# Altium PCB stm32.PcbDoc
Units mm, origin at the board's own origin, x right, y up, seen from the top; angles counter-clockwise.
Board outline 35.2 x 35.2 mm, 4 copper layers (L1(Signal), L2(GND), L3(GND), L4(Signal)), stack 1.57 mm thick; 35 components, 27 nets, 172 pads, 66 vias.
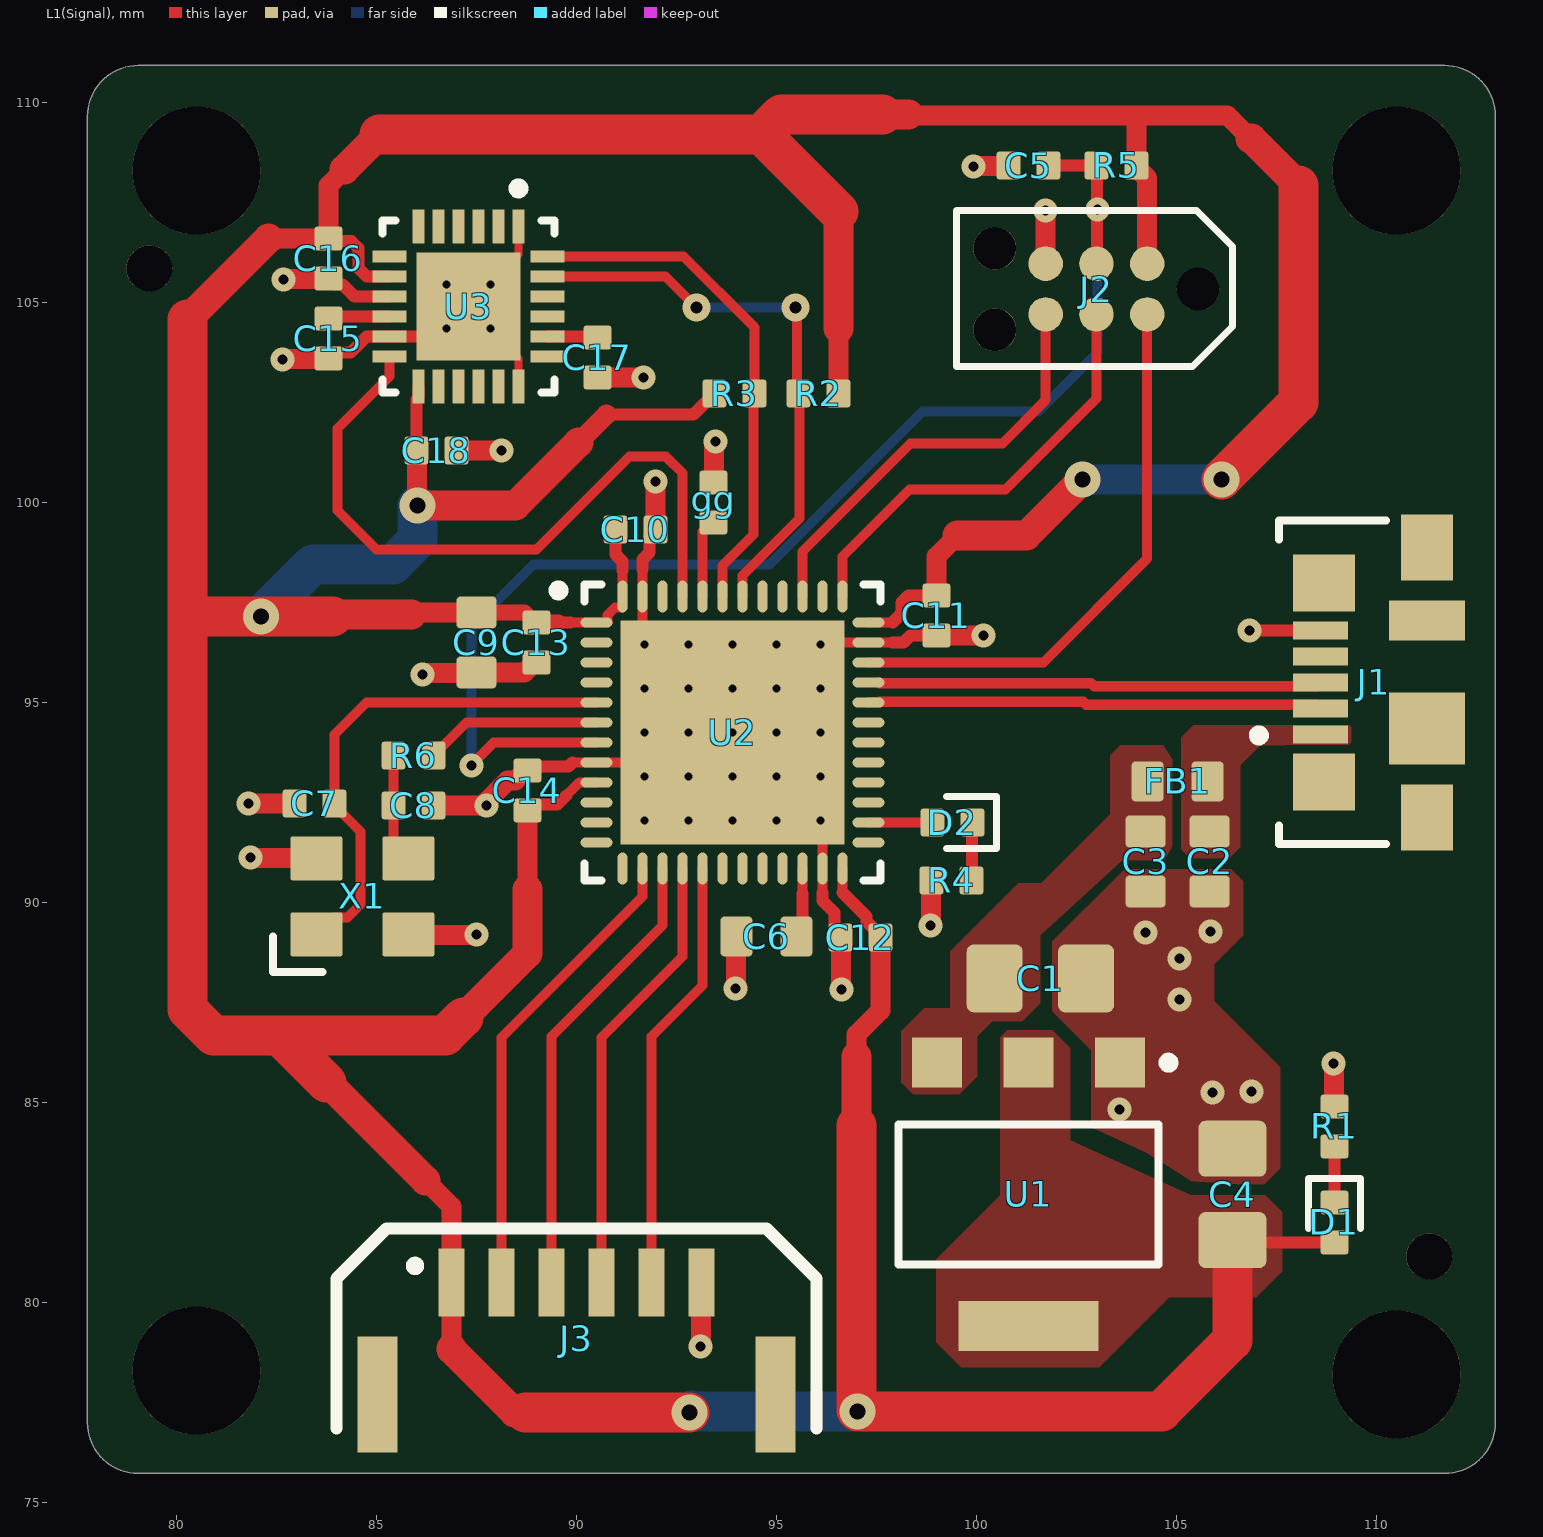
[diagram p0: L1(Signal) view]
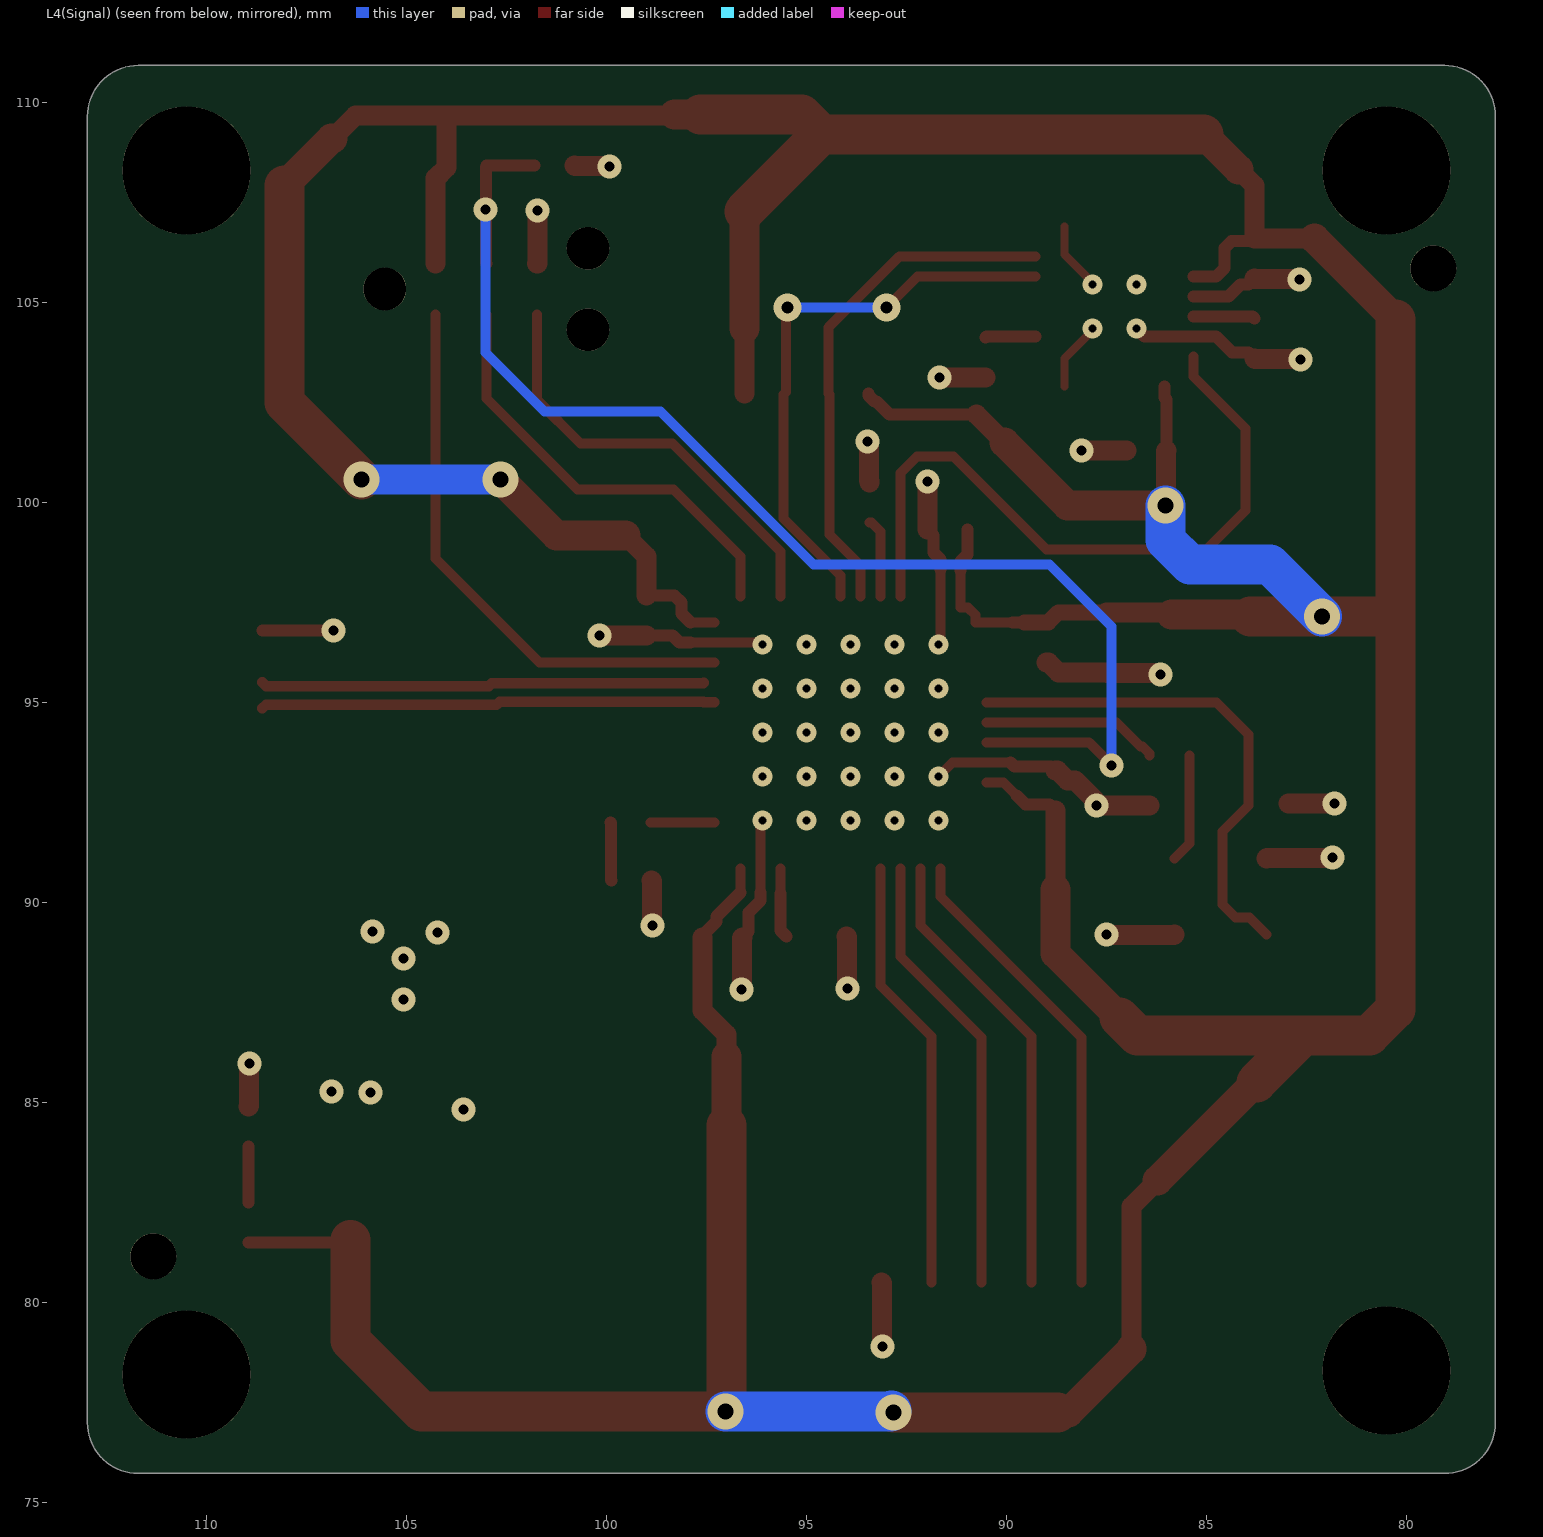
[diagram p1: L4(Signal) view, seen from below]
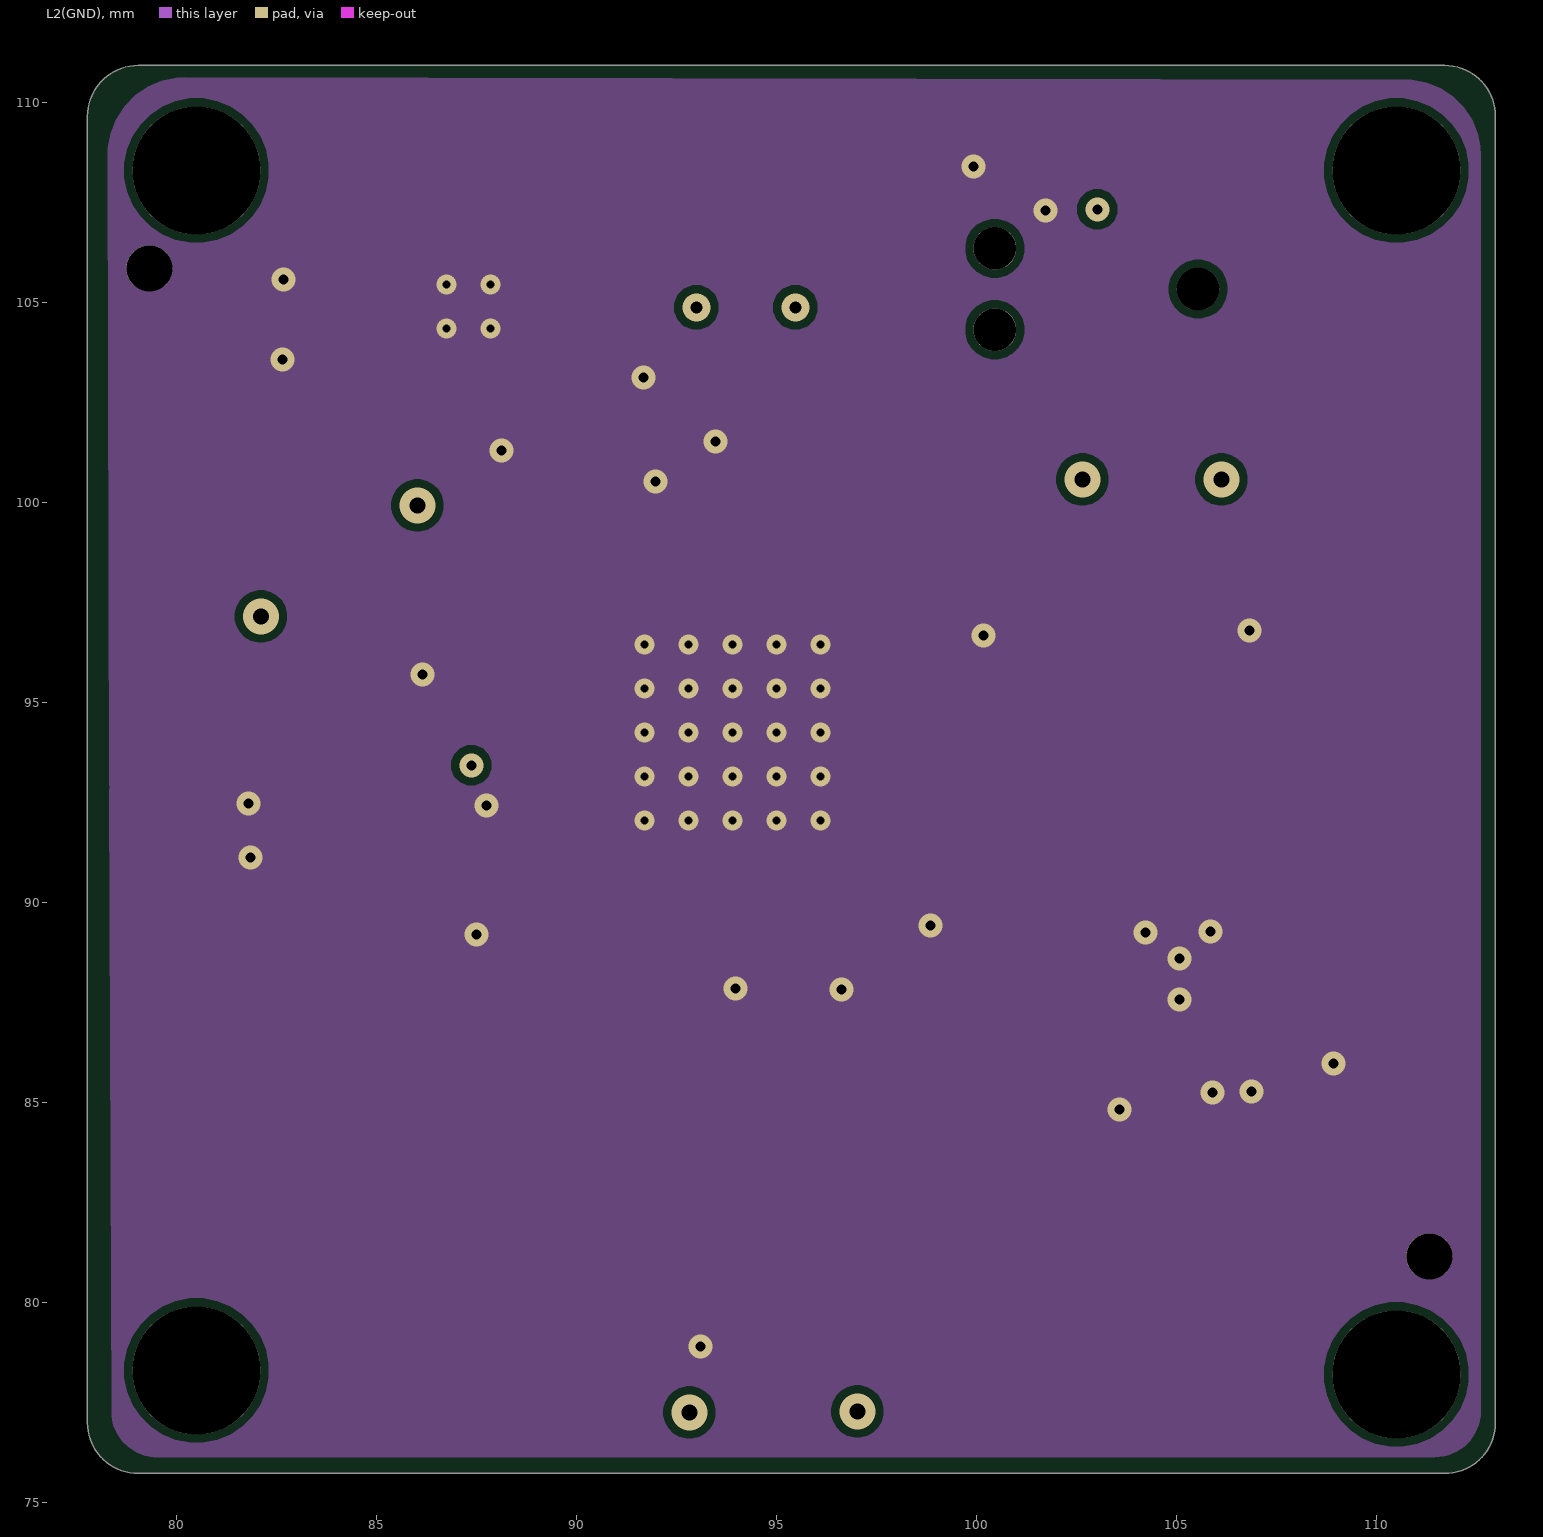
[diagram p2: L2(GND)]
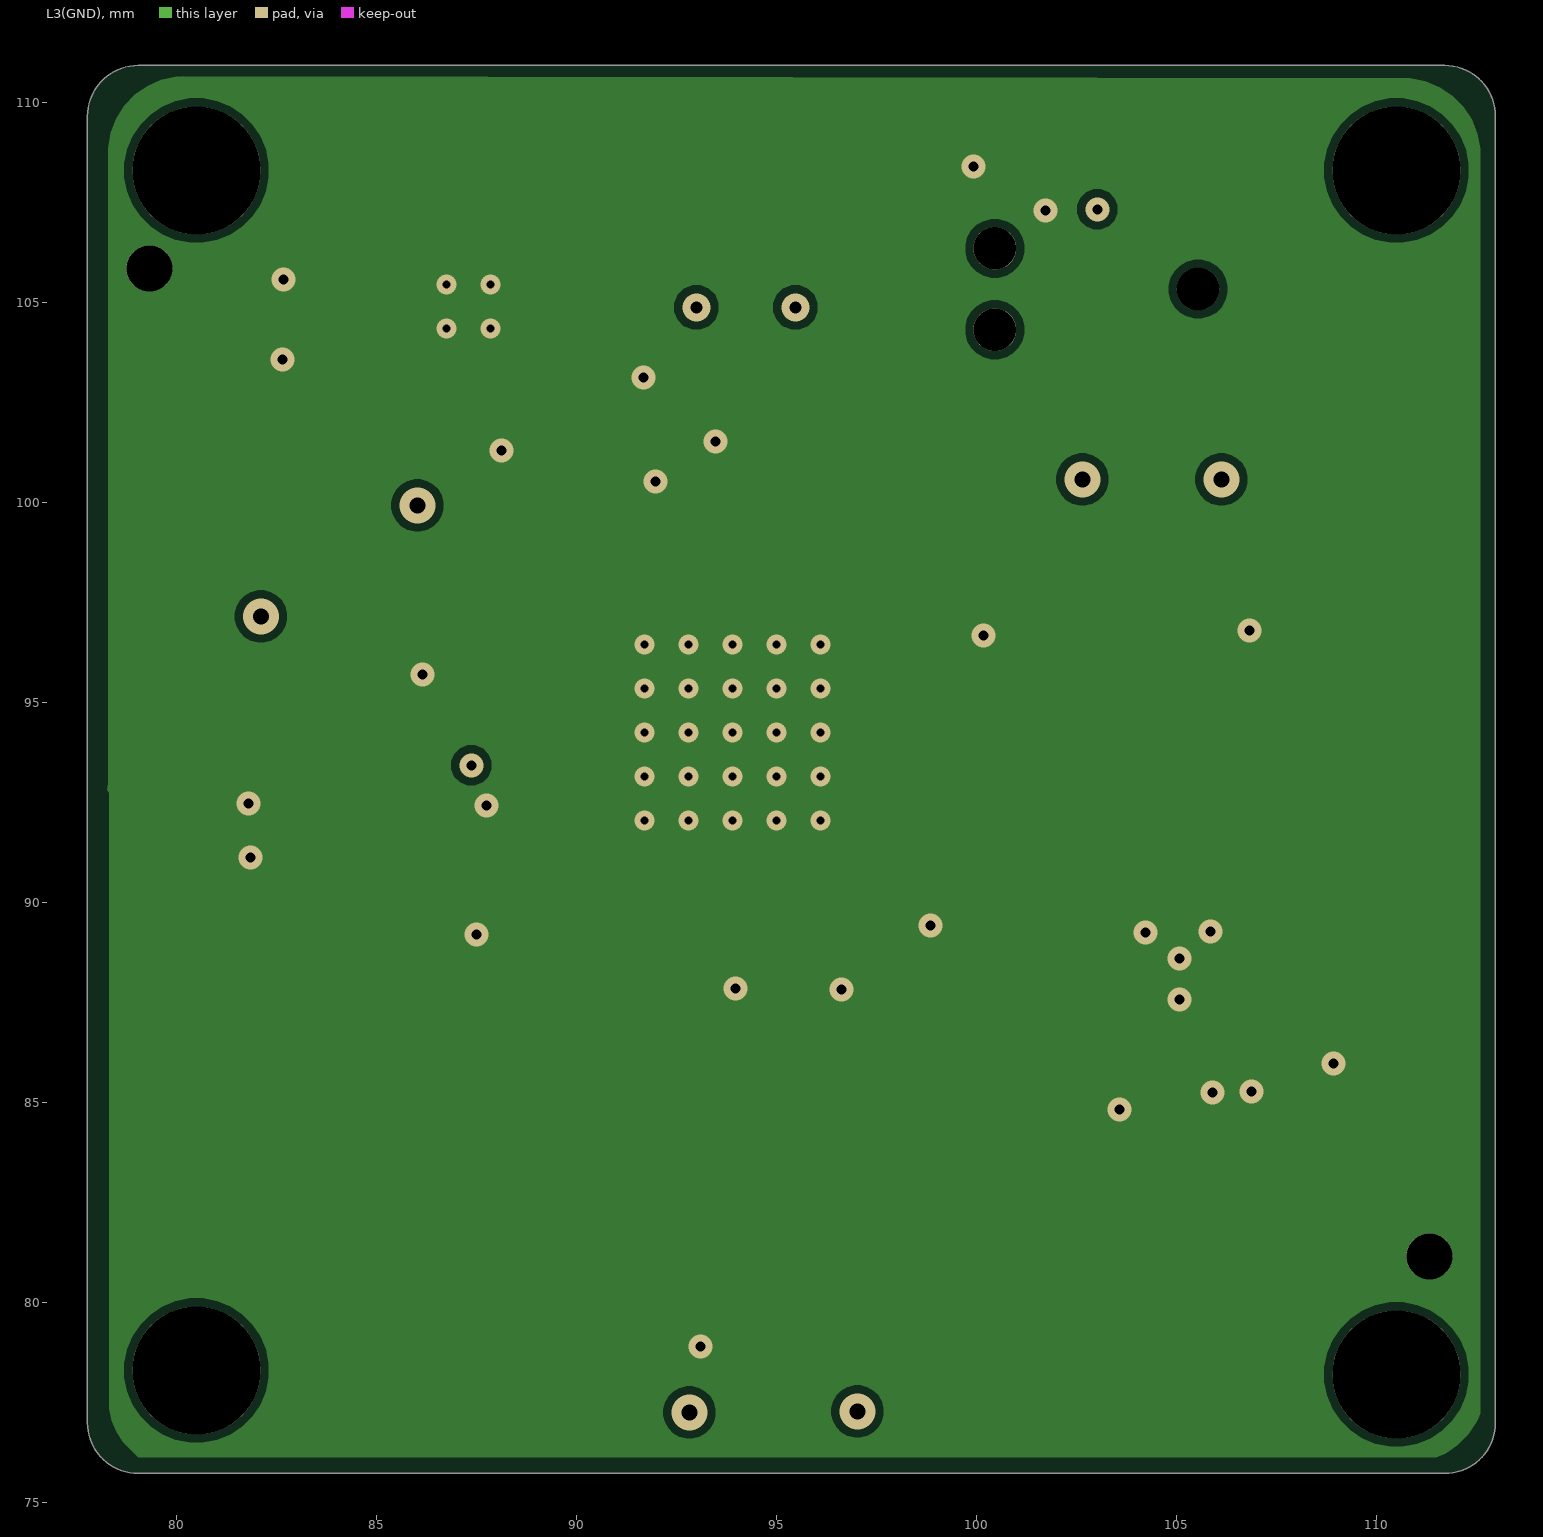
[diagram p3: L3(GND)]
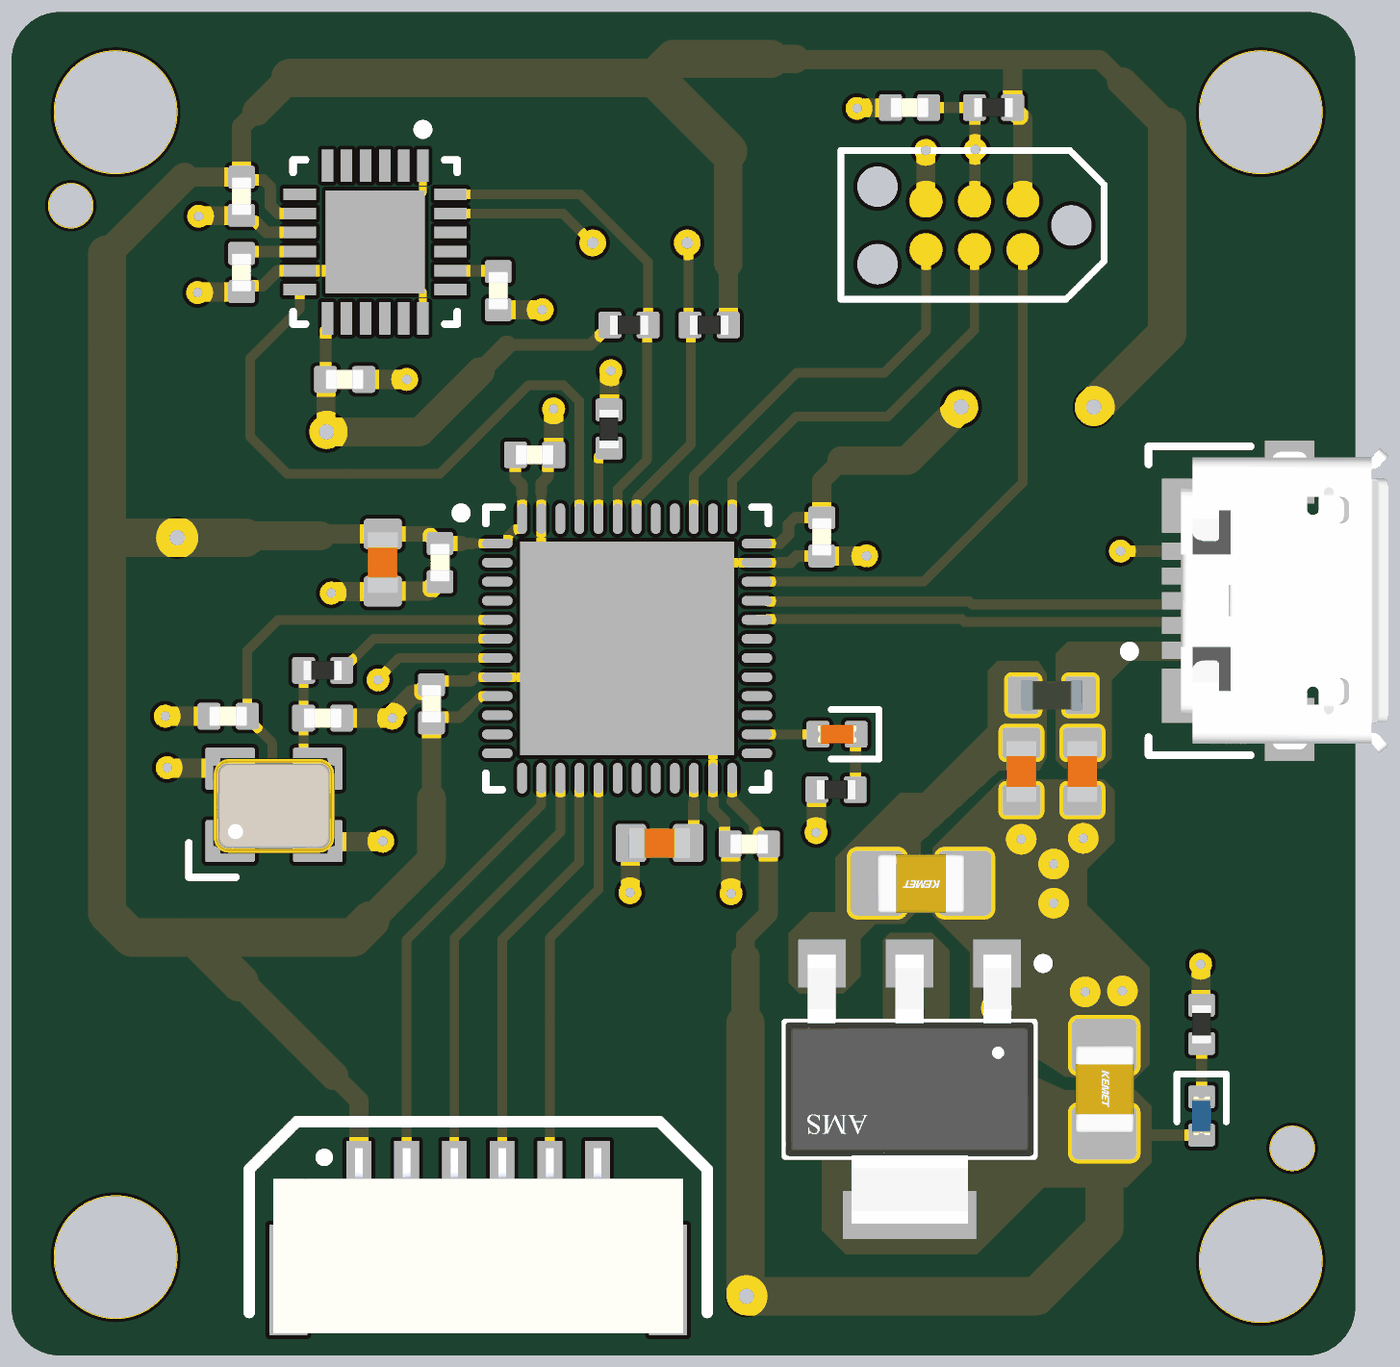
[diagram p4: 3D render of the assembled board from above, using the file's embedded part models]

## Layer stack, top to bottom
Top Solder: solder mask 0.0254, SM-001, Dk 4
L1(Signal): signal copper 0.035
Dielectric 1: prepreg 0.2, PP-017, Dk 4.6
L2(GND): signal copper 0.0175
Dielectric 3: core 1.065, Core-039, Dk 4.6
L3(GND): signal copper 0.0175
Dielectric 5: prepreg 0.2, PP-017, Dk 4.6
L4(Signal): signal copper 0.035
Bottom Solder: solder mask 0.0254, SM-001, Dk 4

## Board outline
77.775,76.995 77.775,109.655 cw(c79.045,109.655) 79.045,110.925 111.705,110.925 cw(c111.705,109.655) 112.975,109.655 112.975,76.995 cw(c111.705,76.995) 111.705,75.725 79.045,75.725 cw(c79.045,76.995)

## Design rules (kind name [scope] priority, off if disabled: settings)
Clearance [All] p1: gap=0.2 ignorepadtopadclearanceinfootprint=FALSE
DiffPairsRouting [All] p1: maxlimit=0.254 minlimit=0.203 mostfreqgap=0.254 toplayer_maxgap=0.203 toplayer_prefgap=0.203 toplayer_minwidth=0.26 toplayer_maxwidth=0.26 toplayer_prefwidth=0.26 bottomlayer_maxgap=0.203 bottomlayer_prefgap=0.203 bottomlayer_minwidth=0.26 bottomlayer_maxwidth=0.26 bottomlayer_prefwidth=0.26 impedanceprofiledriven=TRUE impedanceprofileid={C6D69986-1E30-4C43-89C5-38779B0FD605} impedanceprofilevalue=90.000000 maxuncoupledlength=12.7
HoleSize [All] p1: absolutevalues=TRUE maxlimit=3.5 minlimit=0.025 maxpercent=80.000 minpercent=20.000
MinimumSolderMaskSliver [All] p1: minsoldermaskwidth=0.05
PolygonConnect [All] p1: connectstyle=Direct reliefconductorwidth=0.254 reliefentries=4 polygonreliefangle="90 Angle" airgapwidth=0.254
RoutingVias [All] p1: holewidth=0.3 width=0.7 viastyle="Through Hole" minholewidth=0.2 minwidth=0.5 maxholewidth=0.4 maxwidth=0.9
SilkToSolderMaskClearance [IsPad] p1: minsilkscreentomaskgap=0.2 clearancetoexposedcopper=TRUE
SolderMaskExpansion [All] p1: expansion=0.102 istentingtop=FALSE
SupplyNets "Schematic Supply Nets_3" [InNet('VBUS')] p1: voltage=0.000
SupplyNets "Schematic Supply Nets_2" [InNet('+3V3')] p2: voltage=0.000
SupplyNets "Schematic Supply Nets_1" [InNet('GND')] p3: voltage=0.000
SupplyNets "Schematic Supply Nets" [InNet('+5V')] p4: voltage=0.000
UnRoutedNet [All] p1: checkbadconnections=TRUE
Width [All] p1: maxlimit=1 minlimit=0.2 preferedwidth=0.3 midlayer1_minwidth=0.254 midlayer1_maxwidth=0.254 midlayer1_prefwidth=0.254 midlayer2_minwidth=0.254 midlayer2_maxwidth=0.254 midlayer2_prefwidth=0.254 minimp=50.000000 maximp=50.000000 favimp=50.000000
25 further rules are at their usual default settings.

## Classes and differential pairs
differential pair class DIFF_USB: USB_D
differential pair USB_D: +USB_D_P -USB_D_N

## Components (designator, comment, footprint, x,y, rotation, side; value= is the part's Value field where it differs from the comment)
C1 "22u" CAP_0805 101.6,88.1 r180 top
C2 "2u2" CAP_0603 105.829,91.025 r90 top
C3 "2u2" CAP_0603 104.229,91.025 r90 top
C4 "22u" CAP_0805 106.4,82.7 r270 top
C5 "100n" CAP_0402 101.3,108.425 r0 top
C6 "2u2" CAP_0603 94.75,89.15 r0 top
C7 "10p" CAP_0402 83.45,92.475 r0 top
C8 "10p" CAP_0402 85.925,92.425 r180 top
C9 "2u2" CAP_0603 87.5,96.5 r90 top
C10 "100n" CAP_0402 91.475,99.325 r180 top
C11 "100n" CAP_0402 99,97.175 r90 top
C12 "100n" CAP_0402 97.1,89.125 r0 top
C13 "100n" CAP_0402 89,96.5 r90 top
C14 "100n" CAP_0402 88.775,92.8 r270 top
C15 "100n" CAP_0402 83.8,104.1 r90 top
C16 "10n" CAP_0402 83.8,106.1 r90 top
C17 "2n2" CAP_0402 90.525,103.625 r90 top
C18 "100n" CAP_0402 86.5,101.3 r180 top
D1 "BLUE" LED_0402_BLUE 108.95,82 r90 top
D2 "RED" LED_0402_RED 99.4,92 r0 top
FB1 "120R" FB_0603 105.029,93.025 r180 top
gg "10k" RES_0402 93.425,100 r270 top (schematic designator R7)
J1 "473460001" FP-473460001-MFG 110.91,95.5 r90 top
J2 "TC2030" TC2030-FP 103,105.335 r180 top
J3 "SM06B-GHS-TB" SM06B-GHS-TB 90,79.1 r0 top
R1 "1k" RES_0402 108.95,84.4 r270 top
R2 "2k2" RES_0402 96.05,102.725 r0 top
R3 "2k2" RES_0402 93.95,102.725 r180 top
R4 "1k" RES_0402 99.375,90.55 r0 top
R5 "10k" RES_0402 103.5,108.425 r0 top
R6 "0R" RES_0402 85.925,93.675 r180 top
U1 "AMS1117-3.3" FP-AMS1117-IPC_C 101.3,82.7 r270 top
U2 "STM32F411CEU6" STM-UFQFPN48_L 93.9,94.25 r0 top
U3 "MPU-6050" IS-QFN-24_V 87.3,104.9 r270 top
X1 "24MHz" XTAL_3225 84.65,90.15 r0 top

## Footprints (in the part's own frame and the unit in brackets; to place one, negate y for a bottom-side part, rotate by r counter-clockwise, add the part's x,y. Pads: shape width x height; smd on the part's side, far side on the other; paste and mask are expansions set on the pad)
CAP_0402 [mm]
  rrect25% 0.6x0.7 smd: 1(-0.5,0) 2(0.5,0)
  body extent -0.5,-0.26 0.5,0.26, height 0.37
CAP_0603 [mm]
  rrect25% 0.8x1 smd: 1(-0.75,0) 2(0.75,0)
  body extent -0.8,-0.4 0.8,0.4, height 0.51
CAP_0805 [mm]
  rrect25% 1.4x1.7 smd: 1(-1.143,0) 2(1.143,0)
  body extent -1.15,-0.76 1.15,0.79, height 1.01
FB_0603 [mm]
  rrect25% 0.8x1 smd: 1(-0.75,0) 2(0.75,0)
  body extent -0.8,-0.4 0.8,0.4, height 0.81
FP-473460001-MFG [mm]
  rect 0.45x1.38 smd paste+0 mask+0: 1(-1.3,2.31) 2(-0.65,2.31) 3(0,2.31) 4(0.65,2.31) 5(1.3,2.31)
  rect 1.425x1.55 smd paste+0 mask+0: 6(-2.488,2.225) 7(2.488,2.225)
  rect 1.65x1.3 smd paste+0 mask+0: 8(-3.375,-0.35) 11(3.375,-0.35)
  rect 1.8x1.9 smd paste+0 mask+0: 9(-1.15,-0.35)
  rect 1x1.9 smd paste+0 mask+0: 10(1.55,-0.35)
  silkscreen extent -4.05,0.67 4.05,3.97, body extent -4.3,-2.48 4.3,3.45, height 0.25
FP-AMS1117-IPC_C [mm]
  rect 1.25x1.25 smd paste+0 mask+0: 1(-3.295,2.29) 2(-3.295,0) 3(-3.295,-2.29)
  rect 1.25x3.5 smd paste+0 mask+0: 4(3.295,0)
  silkscreen extent -3.42,-3.25 1.75,3.63, body extent -3.9,-3.35 3.9,3.35, height 0.25
IS-QFN-24_V [mm] "QFN, 24-Leads, Body 4x4mm, Pitch 0.5mm, Thermal Pad 2.7x2.6mm"
  rect 0.85x0.3 smd: 1(-2,1.25) 2(-2,0.75) 3(-2,0.25) 4(-2,-0.25) 5(-2,-0.75) 6(-2,-1.25) 13(2,-1.25) 14(2,-0.75) 15(2,-0.25) 16(2,0.25) 17(2,0.75) 18(2,1.25)
  rect 0.3x0.85 smd mask+0.102: 7(-1.25,-1.975) 8(-0.75,-1.975) 9(-0.25,-1.975) 10(0.25,-1.975) 11(0.75,-1.975) 12(1.25,-1.975) 19(1.25,1.975) 20(0.75,1.975) 21(0.25,1.975) 22(-0.25,1.975) 23(-0.75,1.975) 24(-1.25,1.975)
  rect 2.7x2.6 smd: 25(0,0)
  silkscreen extent -3.07,-2.15 2.15,2.15, body extent -2,-2 2,2, height 0.95
LED_0402_BLUE [mm]
  rrect25% 0.6x0.7 smd: A(-0.5,0) K(0.5,0)
  silkscreen extent -0.15,-0.65 1.1,0.65, body extent -0.51,-0.25 0.51,0.25, height 0.45
LED_0402_RED [mm]
  rrect25% 0.6x0.7 smd: A(-0.5,0) K(0.5,0)
  silkscreen extent -0.15,-0.65 1.1,0.65, body extent -0.51,-0.25 0.51,0.25, height 0.45
RES_0402 [mm]
  rrect25% 0.6x0.7 smd: 1(-0.5,0) 2(0.5,0)
  body extent -0.5,-0.25 0.5,0.25, height 0.3
SM06B-GHS-TB [mm]
  rect 0.65x1.7 smd: 1(-3.125,1.4) 2(-1.875,1.4) 3(-0.625,1.4) 4(0.625,1.4) 5(1.875,1.4) 6(3.125,1.4)
  rect 1x2.9 smd: ""(-4.975,-1.4) ""(4.975,-1.4)
  silkscreen extent -6,-2.25 6,2.75, body extent -5.38,-2.8 5.38,2.05, height 4.26
STM-UFQFPN48_L [mm] "QFN, 48-Leads, Body 7.1x7.1mm, Pitch 0.5mm, Thermal Pad 5.6x5.6mm, IPC High Density"
  oval 0.8x0.25 smd: 1(-3.4,2.75) 2(-3.4,2.25) 3(-3.4,1.75) 4(-3.4,1.25) 5(-3.4,0.75) 6(-3.4,0.25) 7(-3.4,-0.25) 8(-3.4,-0.75) 9(-3.4,-1.25) 10(-3.4,-1.75) 11(-3.4,-2.25) 12(-3.4,-2.75) 25(3.4,-2.75) 26(3.4,-2.25) 27(3.4,-1.75) 28(3.4,-1.25) 29(3.4,-0.75) 30(3.4,-0.25) 31(3.4,0.25) 32(3.4,0.75) 33(3.4,1.25) 34(3.4,1.75) 35(3.4,2.25) 36(3.4,2.75)
  oval 0.25x0.8 smd: 13(-2.75,-3.4) 14(-2.25,-3.4) 15(-1.75,-3.4) 16(-1.25,-3.4) 17(-0.75,-3.4) 18(-0.25,-3.4) 19(0.25,-3.4) 20(0.75,-3.4) 21(1.25,-3.4) 22(1.75,-3.4) 23(2.25,-3.4) 24(2.75,-3.4) 37(2.75,3.4) 38(2.25,3.4) 39(1.75,3.4) 40(1.25,3.4) 41(0.75,3.4) 42(0.25,3.4) 43(-0.25,3.4) 44(-0.75,3.4) 45(-1.25,3.4) 46(-1.75,3.4) 47(-2.25,3.4) 48(-2.75,3.4)
  rect 5.6x5.6 smd: 49(0,0)
  silkscreen extent -4.47,-3.7 3.7,3.7, body extent -3.55,-3.55 3.55,3.55, height 0.6
TC2030-FP [mil]
  round 33.98 smd paste-17.01: 1(-50,-25) 2(-50,25) 3(0,-25) 4(0,25) 5(50,-25) 6(50,25)
  round 42.01 hole 42.01 unplated: MH(-100,0) MH(100,-40) MH(100,40)
  silkscreen extent -75,-77 138,76
XTAL_3225 [mm]
  rrect10% 1.3x1.1 smd: 1(-1.15,-0.95) 2(1.15,-0.95) 3(1.15,0.95) 4(-1.15,0.95)
  silkscreen extent -2.23,-1.89 -1,-1, body extent -1.6,-1.28 1.6,1.22, height 0.61

## Part data
C1 C4: library part CAP_0805, "Capacitor SMD 0805"
C2 C3 C6 C9: library part CAP_0603, "Capacitor SMD 0603"
C5 C7 C8 C10 C11 C12 C13 C14 C15 C16 C17 C18: library part CAP_0402, "Capacitor SMD 0402"
D1: library part LED_0402_BLUE, "LED 0402 BLUE SMD"
D2: library part LED_0402_RED, "LED 0402 RED SMD"
FB1: library part FB_0603, "Ferrite Bead SMD 0603"
gg R1 R2 R3 R4 R5 R6: library part RES_0402, "Resistor SMD 0402"
J1: library part CMP-2000-05246-2, "CONN RCPT USB2.0 MICRO B SMD R/A", Current Rating=1.8A, Manufacturer=Molex, Package=0, Temperature="-30°C to +85°C", Temperature Range High=+85°C, Temperature Range Low=-30°C, Voltage Rating=30V, Automotive=No, Category=Conn, ComponentLink2Description=Datasheet, ComponentLink2URL=https://www.molex.com/webdocs/datasheets/pdf/en-us/0473460001_IO_CONNECTORS.pdf, Conn Orientation="Right Angle", Contact Material=Gold,Nickel, Device Class L1=Connectors, Device Class L2="USB Connectors", Device Class L3=unset, Digikey Description="CONN RCPT USB2.0 MICRO B SMD R/A", Footprint Url=https://www.molex.com/pdm_docs/sd/473460001_sd.pdf, Height=2.945mm, Is Female=yes, Lead Free=Yes, Manufacturer Part Number=473460001, Number Of Contacts=5, Octopart=https://octopart.com/47346-0001-molex-7164928, Pitch=0.65mm, RoHS=TRUE, Shielding=true, Usb Standard="USB 2.0"
J2: "Tag-Connect No-Solder SWD Debug Connector DO NOT PLACE", Manufacturer=Tag-Connect, Manufacturer Part Number=TC2030
J3: "Header Connector 6 Position 1.25MM Pitch SMD Horizontal JST GH", Manufacturer=JST, Manufacturer Part Number=SM06B-GHS-TB
U1: library part CMP-209535-000001-1, "LDO Voltage Regulators 1A, 3.3V", Dropout Voltage=1.1V, Manufacturer="Advanced Monolithic Systems", Max Junction Temp=+125°C, Max Power Dissipation=1.2W, Max Supply Voltage=15V, Nominal Supply Current=5mA, Output Current=1A, Output Voltage=3.3V, Package=AMS1117, Temperature="-40°C to +125°C", Temperature Range Low=-40°C, Automotive=No, Category=IC, ComponentLink2Description=Datasheet, ComponentLink2URL=http://www.advanced-monolithic.com/pdf/ds1117.pdf, Device Class L1="Integrated Circuits (ICs)", Device Class L2="Power Management ICs", Device Class L3="Voltage Regulators - Linear", Height=1.8mm, Ipc Land Pattern Name=SOT229P700X180-4, Lead Free=Yes, Manufacturer Part Number=AMS1117-3.3, Number Of Outputs=1, Octopart=https://octopart.com/ams1117-3.3-advanced+monolithic+systems-25899300, Output Type=Fixed, RoHS=TRUE, Standoff Height=0.64mm, Temperature Range High=+125°C
U2: library part CMP-0243-00165-1, "ARM Cortex-M4 32-bit MCU+FPU, 512 KB Flash, 128 KB RAM, 36 I/Os, 48-Pin UFQFPN, -40 to 85 degC, Tray", I/Os (High Current)=36, Operating Frequency(F) (Processor speed) (MHz)=100, Package Description=UFQFPN48, Package Reference="48-Pin Ultra Thin Fine Pitch Quad Flat No-Lead, 7 x 7 x 0.6 mm Body, 0.5 mm Pitch, Exposed Pad", Supply Voltage(Vcc) min (V)=1.7, ComponentLink1Description="Manufacturer URL", ComponentLink1URL=http://www.st.com/, ComponentLink2Description=Datasheet, ComponentLink2URL=http://www.st.com/st-web-ui/static/active/en/resource/technical/document/datasheet/DM00115249.pdf, Core="ARM Cortex-M4", DatasheetVersion="Rev. 6", FLASH Size (Prog) (kB)=512, Internal RAM Size (kB)=128, Mounting Technology="Surface Mount", Packing=Tray
U3: library part CMP-1753-00002-2, "3-Axis Gyroscope, Accelerometer and a Digital Motion Processor(TM) (DMP), 2.375 to 3.46 V, -40 to 85 degC, 24-Pin QFN, RoHS, Tape and Reel", Manufacturer=InvenSense, Standard Package=5,000, Category=Sensors,Transducers, Datasheet URL=http://datasheet.octopart.com/MPU-6050-InvenSense-datasheet-14421344.pdf, Datasheet Version="Rev. 3.3, 05/2012", Dynamic Catalog=MPU-6000™Series, Family=Multifunction, Featured Product=MPU-60506-Axis,IntegratedI²CSolution, Manufacturer URL=http://www.invensense.com/, Online Catalog=MPU-6000™Series, Other Names="1428-1007-2 / MPU6050", Output Type=Digital, Sensor Type=MotionTracking, Unit PriceUSD=Digital
X1: library part TSX-3225_24.0000MF15X-AC, "Crystal SMD 24MHz 10PPM 7pF 3225", Manufacturer=Epson, Manufacturer Part Number="TSX-3225 24.0000MF15X-AC"

## Free pads (board coordinates)
  round 3.2 hole 3.2: MH(80.5,78.3) MH(80.5,108.3) MH(110.5,78.2) MH(110.5,108.3)
  round 1.15 hole 1.15: TH(79.325,105.85) TH(111.325,81.15)

## Via types
v1: diameter 0.6, hole 0.25, L1(Signal) to L4(Signal), 29 vias
v2: diameter 0.5, hole 0.2, L1(Signal) to L4(Signal), 29 vias
v3: diameter 0.9, hole 0.4, L1(Signal) to L4(Signal), 6 vias
v4: diameter 0.7, hole 0.3, L1(Signal) to L4(Signal), 2 vias

## Nets (pads, with @x,y where several pads share a name; then routed paths per layer and width w, separated by ;. In a path a pad name is that pad's centre, name@x,y a point inside that pad or via, vN(x,y) a via of type N, cw(c..) or ccw(c..) an arc to the next point about the centre after c; other vN are vias at no path point)
+3V3: C4.2 C9.2 C10.2 C11.2 C12.2 C13.2 C14.2 C16.2 C18.2 D1.A J2.1 J3.1 R2.2 R3.2 R5.2 U1.2 U1.4 U2.1 U2.9 U2.24 U2.36 U2.48 U3.8 U3.13 | length 176.5
  L1(Signal) w0.25: 89.747,92.675 90.072,93 U2.9 ; 89.85,97 U2.1 90.775,97 90.775,97.185 90.965,97.375 91.15,97.375 U2.48 91.15,98.3 ; 96.65,90.25 U2.24 ; U2.36 97.9,97
  L1(Signal) w0.3: C16.2@83.868,106.532 84.374,106.532 84.55,106.356 84.55,105.855 84.755,105.65 U3.8 ; C18.2 86,102.575 86.05,102.625 U3.13 ; C14.2 88.925,92.45 89.522,92.45 89.747,92.675 ; 89.55,97 89.85,97 ; 90.75,102.2 92.925,102.2 93.25,102.525 93.3,102.525 93.45,102.675 R3.2 ; C10.2 90.975,98.7 91.15,98.525 91.15,98.3 ; 96.65,90.25 97.25,89.65 97.25,89.525 97.6,89.175 C12.2 ; 97.9,97 98.125,97.225 98.125,97.499 98.301,97.675 C11.2 ; C4.2 106.457,81.5 D1.A
  L1(Signal) w0.4: C9.2 88.7,97.25 88.95,97 C13.2 89.55,97
  L1(Signal) w0.5: 82.3,106.6 C16.2 83.8,107.925 84.2,108.325 ; 85.875,97.2 85.925,97.25 C9.2 ; C18.2 86.013,101.287 86.013,99.937 v3(86.025,99.925) ; 86.225,83.05 86.875,82.4 J3.1 86.875,78.85 ; 88.775,90.325 C14.2 ; 90.05,101.5 90.75,102.2 ; R2.2 96.55,104.35 ; 97,86.15 97,86.7 97.6,87.3 C12.2 ; 98.3,109.7 98.325,109.675 104,109.675 ; C11.2 99,98.65 99.525,99.175 ; R5.2@104,108.375 104.27,108.105 J2.1 ; R5.2 104,109.675 ; 106.85,109.1 106.275,109.675 104,109.675
  L1(Signal) w0.75: 80.275,104.575 82.3,106.6 ; 83.75,85.5 83.775,85.5 86.225,83.05 ; 83.9,97.15 83.95,97.2 85.875,97.2 ; 84.2,108.325 85.075,109.2 ; v3(86.025,99.925) 88.475,99.925 90.05,101.5 ; 86.875,78.85 86.875,78.825 88.45,77.25 88.725,77.25 ; 87.175,87.125 88.775,88.725 88.775,90.325 ; 96.55,104.35 96.55,107.275 ; 97,84.425 97,86.15 ; 97.65,109.7 98.3,109.7 ; 99.525,99.175 101.25,99.175 v3(102.65,100.575) ; 106.85,109.1 106.875,109.1 108.05,107.925
  L1(Signal) w1: 80.275,104.575 80.275,97.2 ; 83.75,85.5 82.575,86.675 ; 83.9,97.15 v3(82.113,97.15) 80.325,97.15 80.275,97.2 ; 85.075,109.2 94.625,109.2 ; 87.175,87.125 86.725,86.675 82.575,86.675 ; 88.725,77.25 v3(92.825,77.25) ; 96.55,107.275 94.625,109.2 ; 97,84.425 97,77.3 v3(97.025,77.275) 104.625,77.275 106.4,79.05 C4.2 ; 97.65,109.7 95.125,109.7 94.625,109.2 ; v3(106.125,100.575) 108.05,102.5 108.05,107.925 ; 80.275,97.2 80.275,87.325 80.925,86.675 82.575,86.675
  L4(Signal) w0.75: v3(102.65,100.575) v3(106.125,100.575)
  L4(Signal) w1: v3(82.113,97.15) 83.413,98.45 85.414,98.45 86.025,99.061 v3(86.025,99.925) ; v3@92.875,77.3 92.9,77.275 v3(97.025,77.275)
+5V: C1.2 C3.2 FB1.2 U1.3
GND: C1.1 C2.1 C3.1 C4.1 C5.1 C6.1 C7.1 C8.1 C9.1 C10.1 C11.1 C12.1 C13.1 C14.1 C15.1 C16.1 C17.1 C18.1 gg.1 J1.5 J2.5 J3.6 pad.TH R1.1 R4.1 U1.1 U2.8 U2.23 U2.35 U2.47 U2.49 U3.1 U3.9 U3.11 U3.18 U3.25 X1.2 X1.4 | length 49.4
  L1(Signal) w0.2: v2(87.85,104.35) 87.85,104.3 88.55,103.6 U3.18 ; U3.25@87.85,105.5 88.55,106.2 U3.1
  L1(Signal) w0.25: 89.9,93.5 U2.8 91.35,93.5 v2(91.7,93.15) ; 91.65,98.325 U2.47 91.65,96.5 v2(91.7,96.45) ; v2(96.1,92.05) 96.15,92 U2.23 96.15,90.25 ; v2(96.1,96.45) 96.15,96.5 U2.35 97.9,96.5
  L1(Signal) w0.3: C15.1 83.95,103.75 84.355,103.75 84.755,104.15 U3.11 86.55,104.15 v2(86.75,104.35) ; C16.1 83.95,105.45 84.15,105.45 84.45,105.15 U3.9 ; C14.1@88.786,93.3 88.886,93.4 89.8,93.4 89.9,93.5 ; 91.65,98.325 91.65,98.575 91.825,98.75 91.825,99.175 C10.1 ; 96.15,90.25 96.15,90.043 96.45,89.743 96.45,89.275 C12.1 ; 97.9,96.5 98.175,96.5 98.35,96.675 C11.1 ; v1(106.825,96.8) J1.5
  L1(Signal) w0.5: v1(81.8,92.475) C7.1 ; v1(81.85,91.125) 81.862,91.113 83.487,91.113 X1.4 ; v1(82.65,103.575) 82.662,103.587 83.787,103.587 C15.1 ; v1(82.675,105.575) 82.688,105.588 83.787,105.588 C16.1 ; X1.2 85.812,89.188 87.488,89.188 v1(87.5,89.2) ; v1(86.15,95.7) 86.177,95.7 86.215,95.737 87.487,95.737 C9.1 88.7,95.75 88.95,96 C13.1 ; C8.1 v1(87.75,92.425) 87.769,92.444 87.769,92.537 88.283,93.05 88.475,93.05 88.725,93.3 C14.1 ; C18.1 v1(88.125,101.3) ; C17.1 v1(91.675,103.125) ; C10.1 v1(91.975,100.525) ; v1(93.1,78.9) 93.113,78.913 93.113,80.487 J3.6 ; gg.1 93.425,100.537 93.438,100.55 93.438,101.46 93.475,101.498 v1(93.475,101.525) ; v1(93.975,87.85) 93.988,87.863 93.988,89.137 C6.1 ; C12.1 96.613,89.113 96.613,87.838 v1(96.625,87.825) ; v1(98.85,89.425) 98.862,89.438 98.862,90.537 R4.1 ; C11.1 v1(100.175,96.675) ; v1(99.925,108.4) 99.937,108.412 100.787,108.412 C5.1 ; v1(101.725,107.3) 101.728,107.297 101.728,105.972 J2.5 ; v1(108.925,85.975) 108.937,85.963 108.937,84.912 R1.1
  other v1: 103.575,84.825 105.9,85.25 106.875,85.275 105.075,87.575 105.075,88.6 104.225,89.25 105.85,89.275
  other v2: 91.7,92.05 92.8,92.05 93.9,92.05 95,92.05 92.8,93.15 93.9,93.15 95,93.15 96.1,93.15 91.7,94.25 92.8,94.25 93.9,94.25 95,94.25 96.1,94.25 91.7,95.35 92.8,95.35 93.9,95.35 95,95.35 96.1,95.35 92.8,96.45 93.9,96.45 95,96.45 86.75,105.45 87.85,105.45
IMU_CPOUT: C17.2 U3.20 | length 1.3
  L1(Signal) w0.3: U3.20 90.5,104.15 C17.2
IMU_INT: U2.45 U3.12 | length 17.6
  L1(Signal) w0.25: U3.12 85.325,103.15 84.025,101.85 84.025,99.8 85,98.825 89,98.825 91.325,101.15 92.234,101.15 92.65,100.734 U2.45
IMU_REGOUT: C15.2 U3.10 | length 1.5
  L1(Signal) w0.3: C15.2 83.85,104.65 U3.10
IMU_SCL: R2.1 U2.42 U3.23 | length 14.4
  L1(Signal) w0.25: U3.23 92.225,105.65 v4(93,104.875) ; U2.42 94.15,98.175 95.575,99.6 95.575,102.7 R2.1 95.512,102.762 95.512,104.838 v4(95.475,104.875)
  L4(Signal) w0.25: v4(93,104.875) v4(95.475,104.875)
IMU_SDA: R3.1 U2.43 U3.24 | length 13
  L1(Signal) w0.25: U3.24 92.68,106.15 94.45,104.38 R3.1 94.425,102.7 94.425,99.2 93.65,98.425 U2.43
LED_MCU_A: D2.A U2.26 | length 1.6
  L1(Signal) w0.25: U2.26 D2.A
LED_MCU_K: D2.K R4.2 | length 1.5
  L1(Signal) w0.3: R4.2 99.887,90.562 99.887,91.987 D2.K
LED_PWR_K: D1.K R1.2 | length 1.4
  L1(Signal) w0.3: D1.K R1.2
MCU_BOOT0: gg.2 U2.44 | length 2
  L1(Signal) w0.25: U2.44 93.15,99.275 93.375,99.5 gg.2
MCU_NRST: C5.2 J2.3 R5.1 U2.7 | length 32.6
  L1(Signal) w0.25: v1(87.375,93.425) 87.375,93.444 87.931,94 U2.7 ; C5.2 C5.2@101.812,108.437
  L1(Signal) w0.3: C5.2 R5.1 ; J2.3 103.012,105.982 103.012,107.312 v1(103.025,107.325) 103.012,107.338 103.012,108.387 R5.1@103,108.4
  L4(Signal) w0.25: v1(87.375,93.425) 87.375,96.9 88.925,98.45 94.825,98.45 98.65,102.275 101.55,102.275 103.025,103.75 v1(103.025,107.325)
MCU_OSC_IN: C7.2 U2.5 X1.1 | length 12.8
  L1(Signal) w0.25: X1.1 83.925,89.625 84.275,89.625 84.6,89.95 84.6,91.775 83.95,92.425 C7.2 83.95,94.2 84.75,95 U2.5
MCU_OSC_OUT: R6.1 U2.6 | length 4.4
  L1(Signal) w0.25: R6.1 86.425,93.725 86.6,93.9 86.65,93.9 87.25,94.5 U2.6
MCU_PA4: J3.2 U2.14 | length 11.8
  L1(Signal) w0.25: J3.2 88.125,86.625 91.65,90.15 U2.14
MCU_PA5: J3.3 U2.15 | length 11.5
  L1(Signal) w0.25: J3.3 89.375,86.65 92.15,89.425 U2.15
MCU_PA6: J3.4 U2.16 | length 11.2
  L1(Signal) w0.25: J3.4 90.625,86.625 92.65,88.65 U2.16
MCU_PA7: J3.5 U2.17 | length 10.9
  L1(Signal) w0.25: J3.5 91.875,86.65 93.15,87.925 U2.17
MCU_SWCLK: J2.4 U2.37 | length 11.1
  L1(Signal) w0.25: U2.37 96.65,98.65 98.325,100.325 100.725,100.325 103,102.6 J2.4
MCU_SWDIO: J2.2 U2.34 | length 14.1
  L1(Signal) w0.25: U2.34 101.675,96 104.27,98.595 J2.2
MCU_SWO: J2.6 U2.39 | length 10.9
  L1(Signal) w0.25: U2.39 95.65,98.775 98.35,101.475 100.65,101.475 101.73,102.555 J2.6
MCU_VCAP1: C6.2 U2.22 | length 1.8
  L1(Signal) w0.25: 95.65,90.225 U2.22
  L1(Signal) w0.3: C6.2 95.65,89.3 95.65,90.225
USB_D_N: J1.2 U2.32 | length 11.4
  L1(Signal) w0.26: U2.32 97.565,95 97.583,95.018 102.673,95.018 102.748,94.943 108.507,94.943 J1.2
USB_D_P: J1.3 U2.33 | length 11.1
  L1(Signal) w0.26: U2.33@97.57,95.495 97.583,95.482 102.865,95.482 102.94,95.407 108.507,95.407 J1.3
VBUS: C2.2 FB1.1 J1.1
XTAL_IN: C8.2 R6.2 X1.3 | length 2.7
  L1(Signal) w0.25: R6.2 85.425,91.475 X1.3
pads on no net: J1.4 J1.6 J1.7 J1.8 J1.9 J1.10 J1.11 J2.MH J3. U2.2 U2.3 U2.4 U2.10 U2.11 U2.12 U2.13 U2.18 U2.19 U2.20 U2.21 U2.25 U2.27 U2.28 U2.29 U2.30 U2.31 U2.38 U2.40 U2.41 U2.46 U3.2 U3.3 U3.4 U3.5 U3.6 U3.7 U3.14 U3.15 U3.16 U3.17 U3.19 U3.21 U3.22

## Polygon pours and split planes (outlines as drawn)
GND on L1(Signal) "GND_L01_P007" (solid, pour order 7): 106.525,82.95 107.2,82.95 107.6,83.35 107.6,85.875 105.95,87.525 105.95,88.45 106.675,89.175 106.675,90.525 106.375,90.825 103.7,90.825 101.9,89.025 101.9,87.275 102.875,86.3 102.875,84.375 103.75,83.975 104.275,83.725 105.075,83.225 105.375,83.025
+3V3 on L1(Signal) "+3V3_L01_P002" (solid, pour order 2): 105.375,82.675 107.225,82.675 107.65,82.25 107.65,80.775 107,80.125 104.825,80.125 103.525,78.825 103.075,78.375 99.625,78.375 99,79 99,81.075 100.6,82.675 100.6,86.625 100.775,86.8 101.9,86.8 102.35,86.35 102.35,84.05
+5V on L1(Signal) "+5V_L01_P001" (solid, pour order 1): 103.35,92.2 101.625,90.475 101.05,90.475 99.35,88.775 99.35,87.35 98.7,87.35 98.125,86.775 98.125,85.475 98.15,85.475 98.425,85.2 99.575,85.2 100.025,85.65 100.025,86.65 100.4,87.025 101.15,87.025 101.6,87.475 101.6,89.175 103.65,91.05 104.7,91.05 104.9,91.4 104.9,93.575 104.675,93.925 103.6,93.925 103.35,93.675
VBUS on L1(Signal) "VBUS_L01_P000" (solid, pour order 0): 109.325,94.425 105.425,94.425 105.125,94.125 105.125,91.325 105.35,91.1 106.35,91.1 106.35,91.125 106.6,91.375 106.6,93.425 107.1,93.925 109.3,93.925 109.375,94 109.375,94.375
GND on L2(GND) "GND_L02_P003" (solid, pour order 3): 78.325,92.825 ccw(c78.205,92.875) 78.325,92.925 78.288,108.663 cw(c80.225,108.688) 80.2,110.625 110.7,110.569 cw(c110.7,108.663) 112.606,108.663 112.606,77.281 cw(c111.456,77.281) 111.456,76.131 79.538,76.131 cw(c79.522,77.275) 78.378,77.258
GND on L3(GND) "GND_L03_P004" (solid, pour order 4): 79.048,76.125 78.781,76.392 cw(c79.882,77.493) 78.325,77.493 78.325,92.679 ccw(c78.155,92.68) 78.275,92.8 78.3,92.975 78.3,108.679 cw(c80.223,108.727) 80.175,110.65 110.65,110.6 cw(c110.65,108.65) 112.6,108.65 112.6,77.225 cw(c110.725,78) 111.5,76.125

## Silkscreen, mask and mechanical layers (free items; w line width, h text height)
Top Overlay:
  lines w0.175: 104.9,103.4 105.4,103.4 106.4,104.4 106.4,106.4 105.5,107.3 104.9,107.3
Mechanical 1:
  lines w0.254: 77.775,76.995 ccw(c79.045,76.995) 79.045,75.725 111.705,75.725 ccw(c111.705,76.995) 112.975,76.995 112.975,109.655 ccw(c111.705,109.655) 111.705,110.925 79.25,110.925 79.045,110.925 ccw(c79.045,109.655) 77.775,109.655 77.775,76.995

## Text inside footprints (layer, text, board x,y; h text height)
D1: Mechanical 13 "+" at 108.442,80.117 h0.5 r90
D2: Mechanical 13 "+" at 97.517,92.508 h0.5